# Allegro board ESP8266_SWITCH.brd
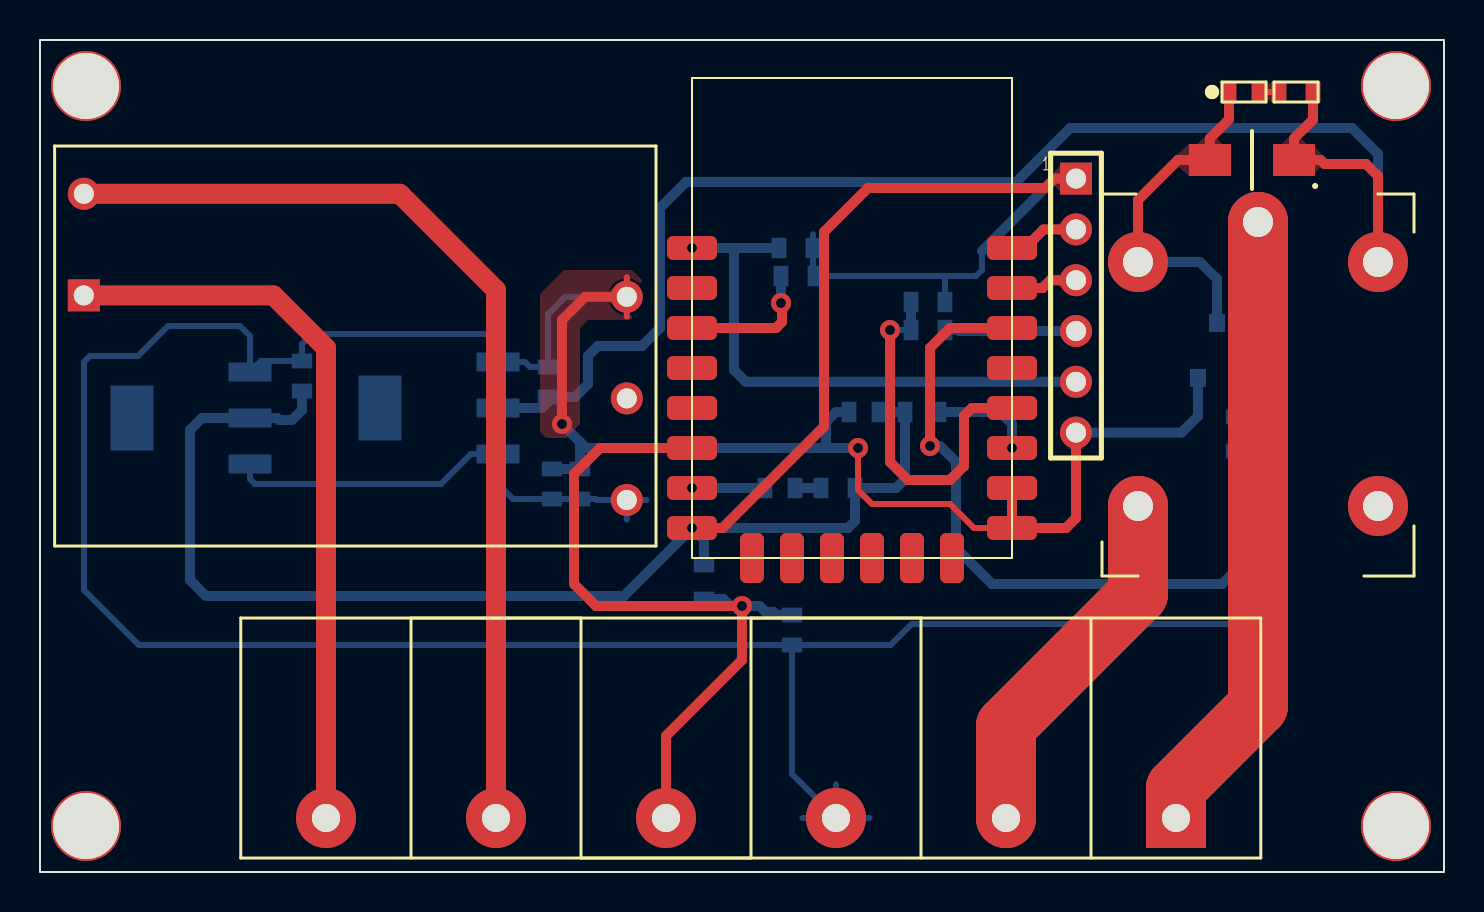
[diagram p0: board, top side]
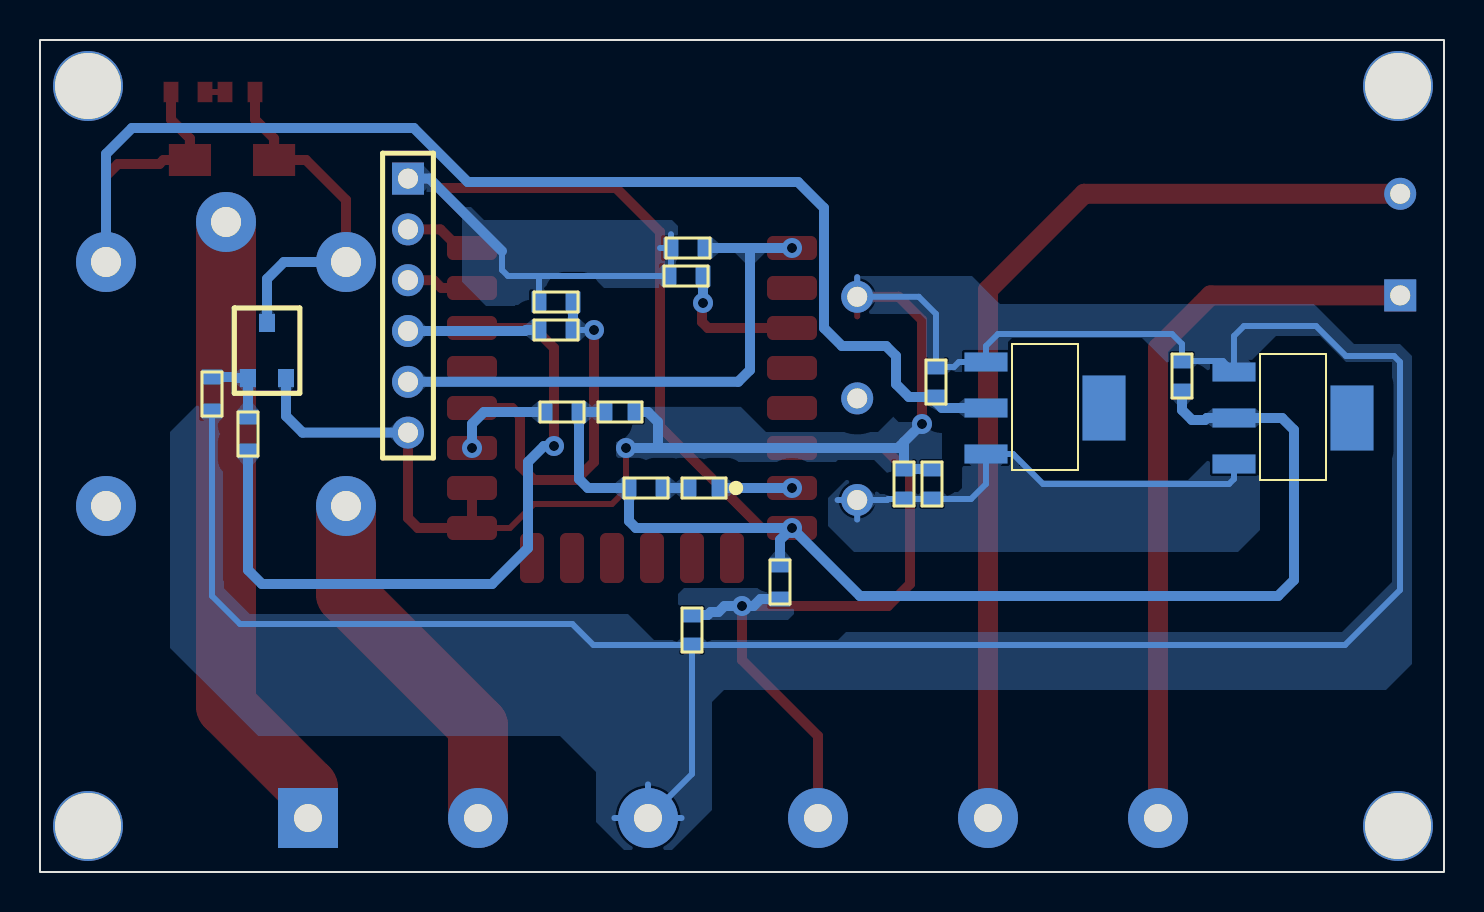
[diagram p1: board, bottom side, seen from below]

Outline 70.2 x 41.6 mm; copper layers: TOP, BOTTOM. Coordinates in mm from the lower left corner of the outline.
Outline path: rectangle 0,0 70.2,41.6

## Design rules (mm)
constraint set DEFAULT: min track width 0.3

## Placement (name value [footprint] x y rotation side)
C1  104  [CAP_SMD_0603]  25.6 19.4 90 bottom
C2  104  [CAP_SMD_0603]  27 19.4 90 bottom
C3  104  [CAP_SMD_0603]  13.1 24.8 90 bottom
C4  104  [CAP_SMD_0603]  25.4 24.5 90 bottom
C6  104  [CAP_SMD_0603]  41.2 23 0 bottom
C7  104  [CAP_SMD_0603]  37.6 12.1 270 bottom
D1  PWM LED  [LED_SMD_0603]  37 19.2 0 bottom
D2  1N4007  [1N4007_SMD]  60.6 35.6 180 top
D3  PWM LED  [LED_SMD_0603]  60.2 39 0 top
J4  CON6  [KF850_6P]  56.8 2.7 180 top
J5  CON6  [J1_6_254]  51.8 33.4 270 top
LS1  RELAY SPDT  [SONGLE_RELAY_5PINS]  60.9 24.4 0 top
M1  12V  [AC2DC_CONVERTER]  30.8 16.3 180 top
NOREF  -  [unnamed]  67.8 2.3 0 top
NOREF#2  -  [unnamed]  2.3 2.3 0 top
NOREF#3  -  [unnamed]  2.3 39.3 0 top
NOREF#4  -  [unnamed]  67.8 39.3 0 top
Q1  MMBT2222A  [SOT23]  59.8 24.7 0 bottom
R1  330R  [RES_SMD_0603]  39.9 19.2 180 bottom
R2  1K  [RES_SMD_0603]  62.8 39 180 top
R3  1K  [RES_SMD_0603]  59.8 21.9 270 bottom
R4  100k  [RES_SMD_0603]  61.6 23.9 270 bottom
R6  10K  [RES_SMD_0603]  37.9 29.8 180 bottom
R7  10K  [RES_SMD_0603]  44.4 28.5 0 bottom
R8  10K  [RES_SMD_0603]  33.2 14.5 90 bottom
R9  10K  [RES_SMD_0603]  37.8 31.2 180 bottom
R10  330  [RES_SMD_0603]  44.4 27.1 180 bottom
R11  10K  [RES_SMD_0603]  44.1 23 180 bottom
U1  AMS1117  [SOT223]  7.6 22.8 270 bottom
U2  AMS1117  [SOT223]  20 23.3 270 bottom
U3  ESP8266-12E  [ESP8266_SMD]  32.6 15.7 0 top

## Library data of the parts
C1-C4 C6 C7 = CAPACITOR NON-POL
D1 D3 = LED
D2 = DIODE_0
J4 J5 = CON6
LS1 = RELAY SPDT
M1 = AC2DC_Module
Q1 = NPN BEC_1
R1-R4 R6-R11 = R
U1 U2 = ASM1117
U3 = ESP8266-12E

## Footprints (pads in the part's own frame, mm; a bottom-side part is the same pattern mirrored in y, then rotated)
1N4007_SMD
  rect 2.1x1.6 smd: A(2.104,0) C(-2.104,0)
AC2DC_CONVERTER
  rect 1.6x1.6 hole 1: 1(28.61,-12.53)
  round 1.6 hole 1: 2(28.61,-17.61) 3(1.46,-2.3) 4(1.46,-7.38) 5(1.46,-12.46)
CAP_SMD_0603
  rect 0.74x1.02 smd: 1(-0.75,0) 2(0.75,0)
ESP8266_SMD
  rrect 2.5x1.2 smd: 1(0,15.5) 2(0,13.5) 3(0,11.5) 4(0,9.5) 5(0,7.5) 6(0,5.5) 7(0,3.5) 8(0,1.5) 15(16,1.5) 16(16,3.5) 17(16,5.5) 18(16,7.5) 19(16,9.5) 20(16,11.5) 21(16,13.5) 22(16,15.5)
  rrect 1.2x2.5 smd: 9(3,0) 10(5,0) 11(7,0) 12(9,0) 13(11,0) 14(13,0)
J1_6_254
  rect 1.6x1.6 hole 1: 1(-1.27,0)
  round 1.6 hole 1: 2(1.27,0) 3(3.81,0) 4(6.35,0) 5(8.89,0) 6(11.43,0)
KF850_6P
  rect 3x3 hole 1.4: 1(0,0)
  round 3 hole 1.4: 2(8.5,0) 3(17,0) 4(25.5,0) 5(34,0) 6(42.5,0)
LED_SMD_0603
  rect 0.74x1.02 smd: 1(-0.75,0) 2(0.75,0)
RES_SMD_0603
  rect 0.74x1.02 smd: 1(-0.85,0) 2(0.85,0)
SONGLE_RELAY_5PINS
  round 3 hole 1.5: 1(-6,6.1) 2(6,6.1) 3(0,8.1) 4(-6,-6.1) 5(6,-6.1)
SOT23
  rect 0.8x0.9 smd: 1(0,0) 2(-1.9,0) 3(-0.95,-2.75)
SOT223
  rect 3.25x2.15 smd: (0.1,3)
  rect 0.95x2.15 smd: 1(-2.201,-2.901) 2(0.099,-2.901) 3(2.399,-2.901)
unnamed
  round 3.5 hole 3.3: (0,0)

## Nets
3V3: C3.1 C6.2 J5.1 R1.1 R6.1 R7.2 R8.2 R9.1 R11.2 U1.2(VOUT) U3.8(VCC)
5V: C4.1 D2.C(K) LS1.2 R2.1 U2.2(VOUT)
12V: C1.1 C2.1 M1.3 U1.3 U2.3
GND: C1.2 C2.2 C3.2 C4.2 C6.1 C7.2 J4.3 J5.6 M1.5 Q1.2(E) R4.2 U1.1 U2.1 U3.15 U3.16
A2: D2.A D3.1(CATHODE) LS1.1 Q1.3
AC1: J4.6 M1.1
AC2: J4.5 M1.2(AC2)
CT: C7.1 J4.4 R8.1 U3.6
DTR: J5.4 R10.1
PWM: R3.2 U3.20
RL1: J4.2 LS1.4(NO)
RL2: J4.1 LS1.3
RST: J5.5 R9.2 U3.1
RX: J5.3 U3.21
STATUS: D1.1(CATHODE) U3.7
TX: J5.2 U3.22
N348867: Q1.1 R3.1 R4.1
N351637: R6.2 U3.3
N351765: R7.1 R10.2 U3.18
N356199: R11.1 U3.17
N3492541: D3.2 R2.2
N3493341: D1.2 R1.2

Pads without a net: LS1 5; M1 4; U3 2 4 5 9 10 11 12 13 14 19

## Via types
v1: diameter 1, hole 0.5, TOP to BOTTOM, 10 vias

## Routing (per net, layer and track width the routed paths; a pad name or vN(x,y) marks a point on that pad's centre or on a via; arc(x,y) is an arc through that point)
3V3: length 112.5
  TOP w0.5: v1(32.6,17.2) 34.13,17.2 39.2,22.27 39.2,32 41.4,34.2 50.25,34.2 50.72,34.67 J5.1
  BOTTOM w0.3: 45.25,29.8 46.8,29.8 47.1,30.1 47.1,31.05 ; 45.25,29.8 R6.1 38.65,29.9 R9.1 ; 45.25,29.8 R7.2 ; R9.1 38.65,31.89 ; R9.1 39.2,31.2
  BOTTOM w0.5: J5.1 50.72,34.67 47.1,31.05 ; R8.2 33.2,16.6 v1(32.6,17.2) ; C6.2 R11.2 43.25,19.65 42.8,19.2 R1.1 40.75,17.55 40.4,17.2 v1(32.6,17.2) ; v1(32.6,17.2) 29.2,13.8 8.3,13.8 7.5,14.6 7.5,22.1 8.1,22.7 U1.2 11.85,22.7 11.95,22.6 12.6,22.6 13.1,23.1 C3.1
5V: length 72.8
  TOP w0.5: LS1.2 66.9,34.8 66.3,35.4 64.23,35.4 64.03,35.6 D2.C 62.7,36.68 63.65,37.62 R2.1
  BOTTOM w0.5: U2.2 25.1,23.2 25.4,23.5 C4.1 26.75,23.75 27.4,24.4 27.4,25.8 27.9,26.3 30.1,26.3 31,27.2 31,33.2 32.3,34.5 48.81,34.5 51.51,37.2 65.6,37.2 66.9,35.9 LS1.2
12V: length 24.1
  BOTTOM w0.3: U1.3 10.5,19.65 10.75,19.4 20.05,19.4 21.55,20.9 U2.3 22.9,19.4 23.65,18.65 C1.1 C2.1 27.79,18.65 27.84,18.6 M1.3 ; 29.34,17.62 M1.3 ; M1.3 30.32,18.6
GND: length 193.3
  TOP w0.3: U3.15 46.7,17.2 45.5,18.4 41.6,18.4 40.9,19.1 v1(40.9,21.2) ; 29.34,29.74 M1.5 29.34,27.78
  TOP w0.5: M1.5 27.26,28.76 26.1,27.6 v1(26.1,22.4) ; U3.16 U3.15 51.3,17.2 51.8,17.7 J5.6
  BOTTOM w0.3: 38.12,2.7 J4.3 ; J4.3 37.6,4.9 C7.2 ; J4.3 41.48,2.7 ; J4.3 39.8,4.38 ; C7.2 4.95,11.35 2.2,14.1 2.2,25.5 2.5,25.8 4.9,25.8 6.4,27.3 10,27.3 10.5,26.8 U1.1 11.05,25.55 C3.2 13.1,26.4 13.6,26.9 22.3,26.9 22.9,26.3 U2.1 24.25,25.5 24.5,25.25 C4.2 25.4,27.9 26.26,28.76 M1.5 29.34,29.74 ; C7.2 42.53,11.35 43.58,12.4 60.2,12.4 61.6,13.8 R4.2
  BOTTOM w0.5: J5.6 57.07,21.97 57.9,22.8 Q1.2 ; v1(26.1,22.4) 27,21.5 ; 27,21.5 27.3,21.2 39.3,21.2 ; 27,21.5 C2.2 C1.2 ; v1(40.9,21.2) 39.3,21.2 ; 39.3,21.2 39.3,22.5 39.8,23 C6.1
A2: length 17.8
  TOP w0.5: LS1.1 54.9,33.6 56.9,35.6 D2.A 58.5,36.68 59.45,37.63 D3.1
  BOTTOM w0.5: Q1.3 58.85,29.65 58,30.5 LS1.1
AC1: length 36.7
  TOP w1: J4.6 14.3,26.2 11.67,28.83 M1.1
AC2: length 49
  TOP w1: J4.5 22.8,29.1 17.99,33.91 M1.2
CT: length 37.7
  TOP w0.5: U3.6 28,21.2 26.7,19.9 26.7,14.4 27.8,13.3 v1(35.1,13.3) 35.1,10.6 31.3,6.8 J4.4
  BOTTOM w0.5: C7.1 36.81,12.85 36.66,13 36.28,13 35.98,13.3 v1(35.1,13.3) 34.52,13.3 34.17,13.65 R8.1
DTR: length 6.6
  BOTTOM w0.5: J5.4 45.95,27.05 45.9,27.1 R10.1
PWM: length 36.3
  TOP w0.5: v1(44.5,21.3) 44.5,26.2 45.5,27.2 U3.20
  BOTTOM w0.5: v1(44.5,21.3) 45,21.3 45.8,20.5 45.8,16.2 47.6,14.4 59.1,14.4 59.8,15.1 R3.2
RL1: length 18.3
  TOP w3: J4.2 48.3,7.3 54.9,13.9 LS1.4
RL2: length 31.5
  TOP w3: J4.1 56.8,4.2 60.9,8.3 LS1.3
RST: length 27.8
  BOTTOM w0.5: v1(32.6,31.2) 34.7,31.2 ; 34.7,31.2 R9.2 ; 34.7,31.2 34.7,25.1 35.29,24.51 J5.5
RX: length 3.4
  TOP w0.5: U3.21 50.13,29.2 50.52,29.59 J5.3
STATUS: length 3.6
  BOTTOM w0.5: v1(32.6,19.2) D1.1
TX: length 3.6
  TOP w0.5: J5.2 50.18,32.13 49.25,31.2 U3.22
N348867: length 3.8
  BOTTOM w0.5: R3.1 Q1.1 60.48,24.7 60.53,24.75 R4.1
N351637: length 6.9
  TOP w0.5: U3.3 36.8,27.2 37.1,27.5 37.1,28.4 v1(37.05,28.45)
  BOTTOM w0.5: R6.2 v1(37.05,28.45)
N351765: length 18.5
  TOP w0.5: U3.18 46.6,23.2 46.2,22.8 46.2,20.3 45.5,19.6 43.4,19.6 42.5,20.5 v1(42.5,27.1)
  BOTTOM w0.3: R10.2 v1(42.5,27.1)
  BOTTOM w0.5: R7.1 R10.2
N356199: length 5.1
  BOTTOM w0.5: v1(48.6,21.2) 48.6,22.4 48,23 R11.1
N3492541: length 1
  TOP w0.3: D3.2 R2.2
N3493341: length 1.3
  BOTTOM w0.5: D1.2 R1.2

## Copper pours and planes (outline as drawn; the poured copper is in the pictures)
3V3 on BOTTOM: 38.3,32.3 38.3,29.3 38.4,29.2 42,29.2 42.3,29.5 44.7,29.5 45,29.2 45,28 47.6,28 49.1,29.5 49.1,32.7 50.4,34 52.5,34 52.5,35.2 52.3,35.4 50.8,35.4 48,32.6 38.6,32.6
12V on BOTTOM: 9.6,20.9 9.2,20.5 9.2,17.1 10.3,16 29.5,16 30.8,17.3 30.8,18.7 29.9,19.6 28.9,19.6 28.2,18.9 25.5,18.9 25.4,19 24.3,19 24.1,19.2 24.1,21.3 21.8,21.3 20.1,19.6 12.8,19.6 11.5,20.9
GND on TOP: 30.1,29.6 30.1,28.2 29.5,27.6 27.4,27.6 27,27.2 27,22.4 26.3,21.7 25.3,21.7 25,22 25,28.9 26.2,30.1 29.6,30.1
GND on BOTTOM: 61.1,23.4 62.3,23.4 63.7,22 63.7,11.2 59.3,6.8 44.2,6.8 42.4,5 42.4,2.5 41,1.1 38.6,1.1 36.6,3.1 36.6,8.5 36,9.1 2.9,9.1 1.6,10.4 1.6,25.8 2.2,26.4 4.5,26.4 6.5,28.4 22.2,28.4 23.6,29.8 29.4,29.8 30.2,29 30.2,28.5 29.6,27.9 26.2,27.9 25.9,27.6 25.9,25.2 25.7,25 21.9,25 21.8,25.1 21.8,26.5 21.6,26.7 15.1,26.7 13.7,25.3 12.3,25.3 11.8,24.8 11.8,24.7 11.7,24.6 9.7,24.6 9.6,24.7 9.6,25.6 8.4,26.8 6.2,26.8 4.9,25.5 2.6,25.5 2.6,14.5 5.1,12 29.9,12 30.3,11.6 39.5,11.6 40.8,12.9 59.7,12.9 61,14.2 61,23.3
GND on BOTTOM: 26.1,22.6 25.7,22.6 25,21.9 25,20.2 25.4,19.8 28.3,19.8 29,20.5 41.1,20.5 41.4,20.8 41.4,21.5 41,21.9 40.8,21.9 40.7,22 40.7,23.4 40.5,23.6 35.5,23.6 33.9,22 28.3,22 27.4,22.9 26.4,22.9
CT on BOTTOM: 38.3,13.9 38.3,12.5 38.1,12.3 33.1,12.3 32.5,12.9 32.5,14 32.7,14.2 38,14.2

Small or netless copper shapes (teardrops, artwork), in the pictures only: 20 on TOP, 68 on BOTTOM
